# Altium PCB PPG_Proto_1.0.pcbdoc (part 1 of 2)
Units mil, origin at the board's own origin, x right, y up, seen from the top; angles counter-clockwise.
Board outline 5468.87 x 9475.06 mil, 2 copper layers (Top Layer, Bottom Layer); 64 components, 100 nets, 316 pads, 85 vias.
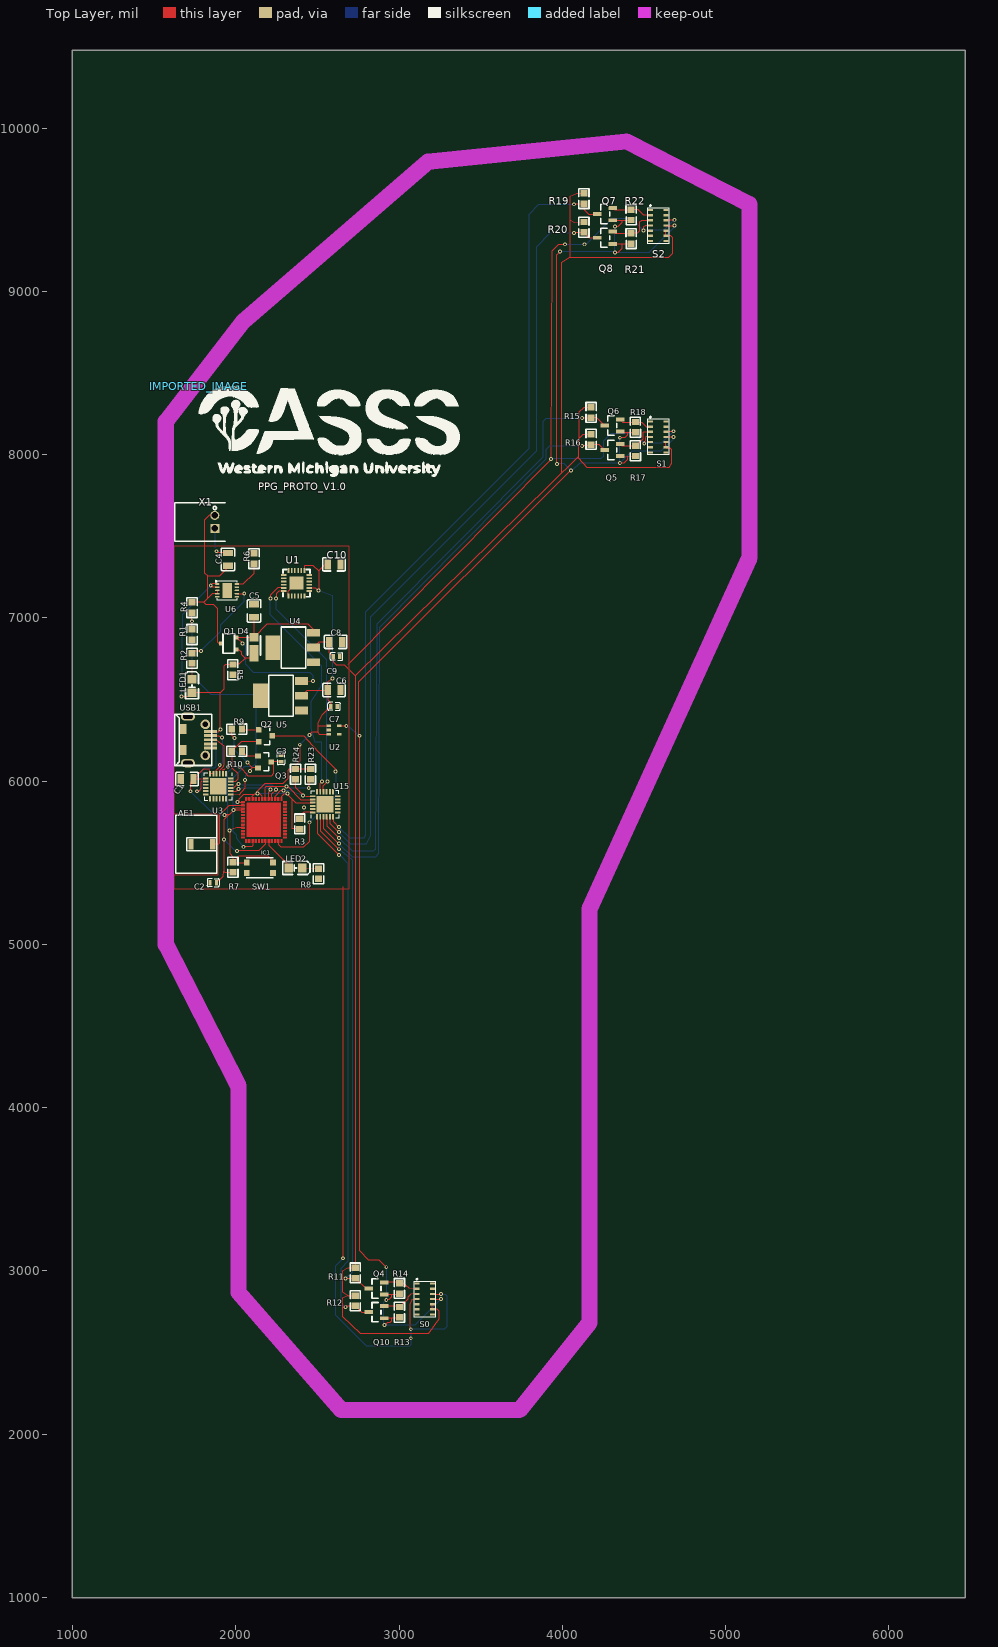
[diagram p0: Top Layer view]
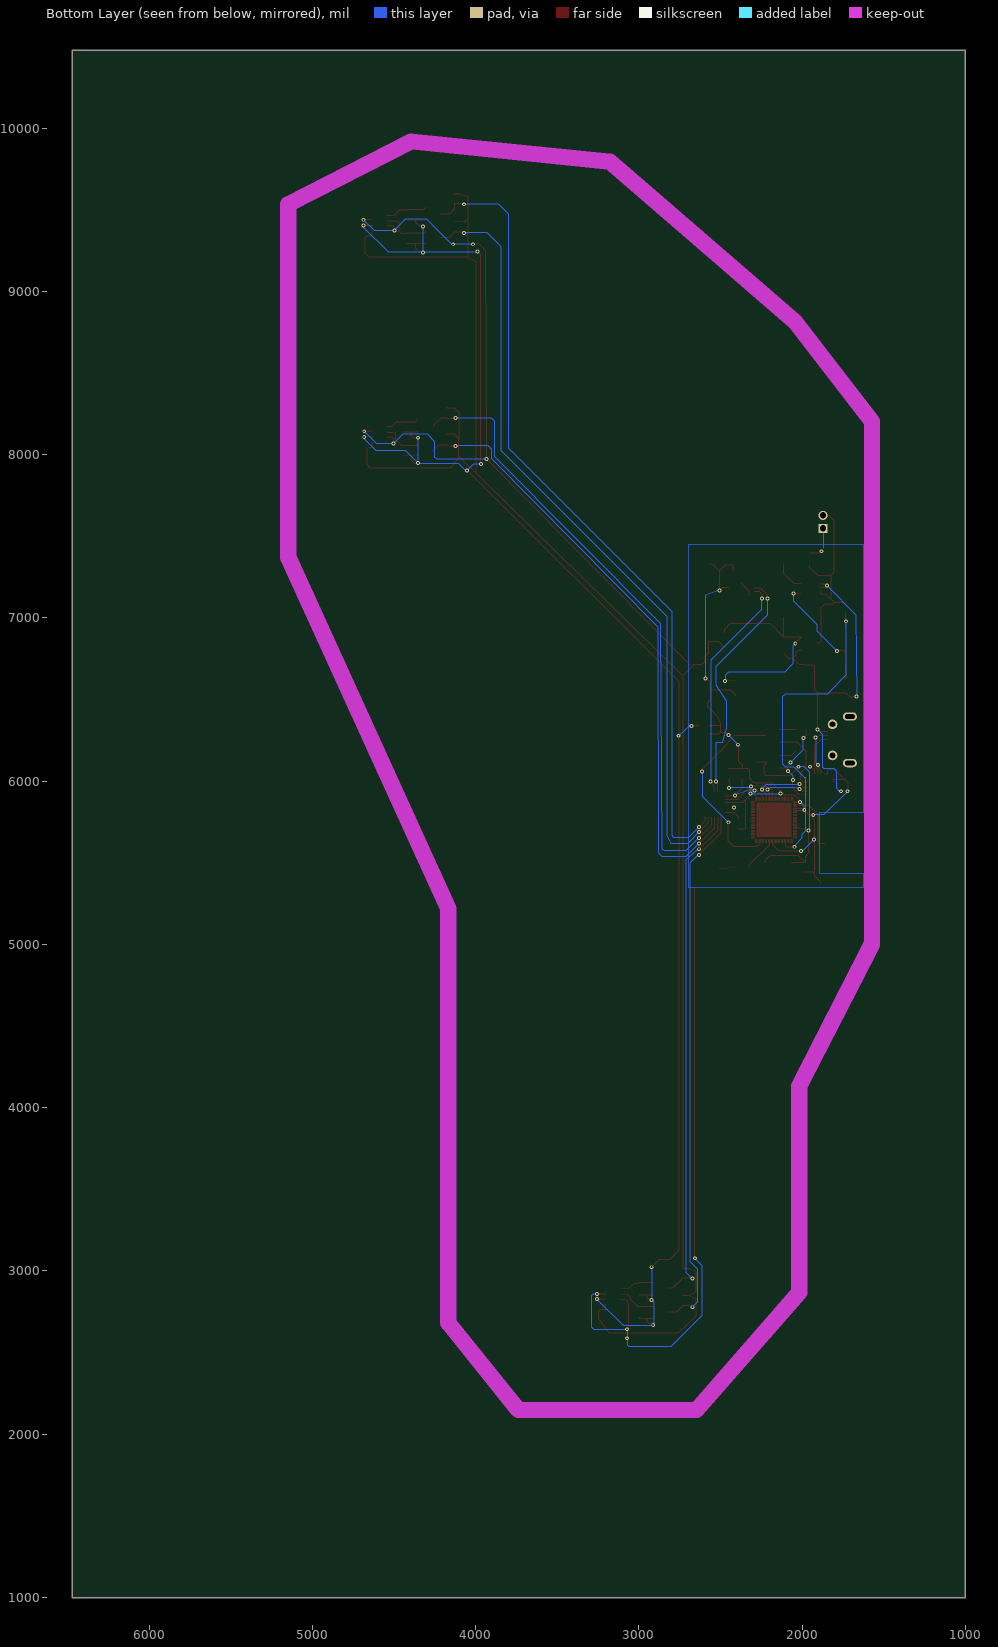
[diagram p1: Bottom Layer view, seen from below]

## Layer stack, top to bottom
Top Layer: signal copper (thickness not stored)
Dielectric: dielectric 12.6, FR-4, Dk 4.8
Bottom Layer: signal copper (thickness not stored)

## Board outline
6468.87,1000 1000,1000 1000,10475.06 6468.87,10475.06

## Components (designator, comment, footprint, x,y, rotation, side; value= is the part's Value field where it differs from the comment)
AE1 "AMCA31-2R450G-S1F-T3" AMCA31-2R450G-S1F-T3.PACK 1792,5613.06 r90 top
C1 "10uF" C0805 1702,6013.06 r180 top
C2 "1uF" C0402 1862,5378.06 r0 top
C3 "1uF" C0402 2277,6138.06 r270 top
C4 "10uF" C0805 1952,7358.06 r270 top
C5 "10uF" C0805 2112,7043.06 r270 top
C6 "10uF" C0805 2602,6558.06 r0 top
C7 "1uF" C0402 2602,6458.06 r180 top
C8 "10uF" C0805 2612,6853.06 r180 top
C9 "1uF" C0402 2617,6763.06 r180 top
C10 "10uF" C0805 2602,7328.06 r0 top
D4 "MBR120" SOD-123HE_L2.8-W1.8-LS3.7-RD 2111.95,6833.06 r90 top
IC1 "ESP32-PICO-V4" QFN48 2172,5763.06 r0 top
IMPORTED_IMAGE "IMPORTED_IMAGE" IMPORTED_IMAGE 1774.12,8419.39 r0 top
LED1 "SZYY0805YG --GREEN LED" LED0805-R-RD 1732,6583.06 r270 top
LED2 "SZYY0805YG --GREEN LED" LED0805-R-RD 2367,5468.06 r180 top
Q1 "DMP2045U-7" SOT-23F 1957,6843.06 r90 top
Q2 "MMBT2222ALT1" SOT23-3 2182,6278.06 r270 top
Q3 "MMBT2222ALT1" SOT23-3 2177,6118.06 r270 top
Q4 "2N7002LT1G" SOT-23_L2.9-W1.3-P0.95-LS2.4-BR 2862,2893.06 r0 top
Q5 "2N7002LT1G" SOT-23_L2.9-W1.3-P0.95-LS2.4-BR 4307,8028.06 r0 top
Q6 "2N7002LT1G" SOT-23_L2.9-W1.3-P0.95-LS2.4-BR 4307,8178.06 r0 top
Q7 "2N7002LT1G" SOT-23_L2.9-W1.3-P0.95-LS2.4-BR 4262,9473.06 r0 top
Q8 "2N7002LT1G" SOT-23_L2.9-W1.3-P0.95-LS2.4-BR 4262,9328.06 r0 top
Q10 "2N7002LT1G" SOT-23_L2.9-W1.3-P0.95-LS2.4-BR 2862,2748.06 r0 top
R1 "100K" R0603 1732,6898.06 r90 top
R2 "10K" R0603 1732,6753.06 r90 top
R3 "10K" R0603 2392,5738.06 r90 top
R4 "100K" R0603 1732,7063.06 r90 top
R5 "100K" R0603 1982,6683.06 r90 top
R6 "10K" R0603 2112,7363.06 r270 top
R7 "10K" R0603 1982,5473.06 r270 top
R8 "10K" R0603 2507,5433.06 r90 top
R9 "10K" R0603 2007,6318.06 r0 top
R10 "10K" R0603 2007,6183.06 r0 top
R11 "4.7K" R0603 2732,2988.06 r90 top
R12 "4.7K" R0603 2732,2818.06 r90 top
R13 "4.7K" R0603 3002,2748.06 r270 top
R14 "4.7K" R0603 3002,2893.06 r270 top
R15 "4.7K" R0603 4177,8258.06 r90 top
R16 "4.7K" R0603 4177,8093.06 r90 top
R17 "4.7K" R0603 4447,8023.06 r270 top
R18 "4.7K" R0603 4447,8168.06 r270 top
R19 "4.7K" R0603 4132,9568.06 r90 top
R20 "4.7K" R0603 4132,9393.06 r90 top
R21 "4.7K" R0603 4422,9323.06 r270 top
R22 "4.7K" R0603 4422,9468.06 r270 top
R23 "4.7K" R0603 2457,6043.06 r90 top
R24 "4.7K" R0603 2367,6043.06 r90 top
S0 "MAX30105SMD" OLGA-14 3157,2828.06 r0 top
S1 "MAX30105SMD" OLGA-14 4587,8108.06 r0 top
S2 "MAX30105SMD" OLGA-14 4587,9403.06 r0 top
SW1 "KMR2" BTN_KMR2_4.6X2.8 2067,5438.06 r180 top
U1 "MPU6050" QFN50P400X400X95-25T265X275N 2372,7213.06 r0 top
U2 "TLV70018DCKR" SC70 2602,6313.06 r270 top
U3 "CP2104" QFN-24-1EP_4X4MM_PITCH0.5MM 1892,5968.06 r270 top
U4 "ADP3338AKCZ-5-R7" SOT-223 2352,6818.06 r180 top
U5 "ADP3338AKCZ-3.3RL7" SOT-223 2277,6523.06 r180 top
U6 "MCP73223-C2SI/MF COPY" TDFN-10_L3.0-W3.0-P0.50-BL-EP 1947,7168.06 r270 top
U15 "TCA9548A_QFN" QFN-24-1EP_4X4MM_PITCH0.5MM 2547,5858.06 r90 top
USB1 "MICRO USB 5S B" MICRO-USB-1 1757,6253.06 r180 top
X1 "S2B-PH-K-S(LF)(SN)" S2B-PH-K-S(LF)(SN) 1872,7588.06 r0 top
? "" ? 5811.93,6033.06 r0 top
? "" ? 3352,1727.53 r0 top

## Footprints (in the part's own frame and the unit in brackets; to place one, negate y for a bottom-side part, rotate by r counter-clockwise, add the part's x,y. Pads: shape width x height; smd on the part's side, far side on the other; paste and mask are expansions set on the pad)
AMCA31-2R450G-S1F-T3.PACK [mil]
  rect 63x31.5 smd: G(0,66.93) S(0,-66.93)
  silkscreen extent -177,-92 177,160
BTN_KMR2_4.6X2.8 [mil]
  rect 35.43x35.43 smd: A(0,0) A'(-161.42,0) B(0,-62.99) B'(-161.42,-62.99)
  silkscreen extent -163,-92 2,29
C0402 [mm]
  rect 0.5x0.8 smd: 1(-0.5,0) 2(0.5,0)
  silkscreen extent -0.95,-0.6 0.95,0.6
C0805 [mm]
  rect 1x1.55 smd: 1(-1,0) 2(1,0)
  silkscreen extent -1.75,-1.04 1.75,1.04
IMPORTED_IMAGE [mil]
  silkscreen extent -1,-555 1598,0
LED0805-R-RD [mil]
  rect 51.2x55.1 smd: 1(41.35,0) 2(-41.35,0)
  silkscreen extent -88,-41 78,40
MICRO-USB-1 [mm]
  round 1.5 hole 0.9: 0(-1.44,2.431) 0(-1.44,-2.41)
  oval 2.199x1.3 hole 0.7 slot 1.5 at 0 deg: 0(1.26,3.619) 0(1.26,-3.619)
  rect 1.2x1.6 smd: 0(2.071,-1.683) 0(2.087,1.596)
  rect 2x0.45 smd: 1(-2.225,-1.31) 2(-2.225,-0.66) 3(-2.225,-0.01) 4(-2.225,0.64) 5(-2.225,1.29)
  silkscreen extent -2.43,-4 3.33,4
OLGA-14 [mm]
  rect 0.75x0.35 smd: 1(-1.2,2.4) 2(-1.2,1.6) 3(-1.2,0.8) 4(-1.2,0) 5(-1.2,-0.8) 6(-1.2,-1.6) 7(-1.2,-2.4) 8(1.2,-2.4) 9(1.2,-1.6) 10(1.2,-0.8) 11(1.2,0) 12(1.2,0.8) 13(1.2,1.6) 14(1.2,2.4)
  silkscreen extent -1.65,-2.8 1.65,3.2
QFN48 [mil]
  round 0 smd: 1(-128.94,108.27) 2(-128.94,88.58) 3(-128.94,68.9) 4(-128.94,49.21) 5(-128.94,29.53) 6(-128.94,9.84) 7(-128.94,-9.84) 8(-128.94,-29.53) 9(-128.94,-49.21) 10(-128.94,-68.9) 11(-128.94,-88.58) 12(-128.94,-108.27) 13(-108.27,-128.94) 14(-88.58,-128.94) 15(-68.9,-128.94) 16(-49.21,-128.94) 17(-29.53,-128.94) 18(-9.84,-128.94) 19(9.84,-128.94) 20(29.53,-128.94) 21(49.21,-128.94) 22(68.9,-128.94) 23(88.58,-128.94) 24(108.27,-128.94) 25(128.94,-108.27) 26(128.94,-88.58) 27(128.94,-68.9) 28(128.94,-49.21) 29(128.94,-29.53) 30(128.94,-9.84) 31(128.94,9.84) 32(128.94,29.53) 33(128.94,49.21) 34(128.94,68.9) 35(128.94,88.58) 36(128.94,108.27) 37(108.27,128.94) 38(88.58,128.94) 39(68.9,128.94) 40(49.21,128.94) 41(29.53,128.94) 42(9.84,128.94) 43(-9.84,128.94) 44(-29.53,128.94) 45(-49.21,128.94) 46(-68.9,128.94) 47(-88.58,128.94) 48(-108.27,128.94) EXP(0,0)
  Top Layer region: -104.5,99.27 -104.46,99.9 -104.35,100.53 -104.16,101.13 -103.9,101.7 -103.57,102.24 -103.19,102.74 -102.74,103.19 -102.24,103.57 -101.7,103.9 -101.13,104.16 -100.53,104.35 -99.9,104.46 -99.27,104.5 99.27,104.5 99.9,104.46 100.53,104.35 101.13,104.16 101.7,103.9 102.24,103.57 102.74,103.19 103.19,102.74 103.57,102.24 103.9,101.7 104.16,101.13 104.35,100.53 104.46,99.9 104.5,99.27 104.5,-99.27 104.46,-99.9 104.35,-100.53 104.16,-101.13 103.9,-101.7 103.57,-102.24 103.19,-102.74 102.74,-103.19 102.24,-103.57 101.7,-103.9 101.13,-104.16 100.53,-104.35 99.9,-104.46 99.27,-104.5 -99.27,-104.5 -99.9,-104.46 -100.53,-104.35 -101.13,-104.16 -101.7,-103.9 -102.24,-103.57 -102.74,-103.19 -103.19,-102.74 -103.57,-102.24 -103.9,-101.7 -104.16,-101.13 -104.35,-100.53 -104.46,-99.9 -104.5,-99.27
  Top Layer region: -119.88,114.17 -119.67,114.16 -119.46,114.12 -119.25,114.06 -119.06,113.97 -118.88,113.86 -118.71,113.73 -118.56,113.58 -118.42,113.41 -118.31,113.22 -118.23,113.03 -118.16,112.83 -118.12,112.61 -118.11,112.4 -118.11,104.13 -118.12,103.92 -118.16,103.71 -118.23,103.51 -118.31,103.31 -118.42,103.13 -118.56,102.96 -118.71,102.81 -118.88,102.68 -119.06,102.56 -119.25,102.48 -119.46,102.41 -119.67,102.37 -119.88,102.36 -137.99,102.36 -138.21,102.37 -138.42,102.41 -138.62,102.48 -138.82,102.56 -139,102.68 -139.17,102.81 -139.32,102.96 -139.45,103.13 -139.56,103.31 -139.65,103.51 -139.71,103.71 -139.75,103.92 -139.76,104.13 -139.76,112.4 -139.75,112.61 -139.71,112.83 -139.65,113.03 -139.56,113.22 -139.45,113.41 -139.32,113.58 -139.17,113.73 -139,113.86 -138.82,113.97 -138.62,114.06 -138.42,114.12 -138.21,114.16 -137.99,114.17
  Top Layer region: -119.88,94.49 -119.67,94.48 -119.46,94.44 -119.25,94.37 -119.06,94.29 -118.88,94.17 -118.71,94.04 -118.56,93.89 -118.42,93.72 -118.31,93.54 -118.23,93.34 -118.16,93.14 -118.12,92.93 -118.11,92.72 -118.11,84.45 -118.12,84.24 -118.16,84.02 -118.23,83.82 -118.31,83.63 -118.42,83.44 -118.56,83.27 -118.71,83.12 -118.88,82.99 -119.06,82.88 -119.25,82.79 -119.46,82.73 -119.67,82.69 -119.88,82.68 -137.99,82.68 -138.21,82.69 -138.42,82.73 -138.62,82.79 -138.82,82.88 -139,82.99 -139.17,83.12 -139.32,83.27 -139.45,83.44 -139.56,83.63 -139.65,83.82 -139.71,84.02 -139.75,84.24 -139.76,84.45 -139.76,92.72 -139.75,92.93 -139.71,93.14 -139.65,93.34 -139.56,93.54 -139.45,93.72 -139.32,93.89 -139.17,94.04 -139,94.17 -138.82,94.29 -138.62,94.37 -138.42,94.44 -138.21,94.48 -137.99,94.49
  Top Layer region: -119.88,74.8 -119.67,74.79 -119.46,74.75 -119.25,74.69 -119.06,74.6 -118.88,74.49 -118.71,74.36 -118.56,74.21 -118.42,74.04 -118.31,73.85 -118.23,73.66 -118.16,73.46 -118.12,73.24 -118.11,73.03 -118.11,64.76 -118.12,64.55 -118.16,64.34 -118.23,64.14 -118.31,63.94 -118.42,63.76 -118.56,63.59 -118.71,63.44 -118.88,63.31 -119.06,63.19 -119.25,63.11 -119.46,63.04 -119.67,63 -119.88,62.99 -137.99,62.99 -138.21,63 -138.42,63.04 -138.62,63.11 -138.82,63.19 -139,63.31 -139.17,63.44 -139.32,63.59 -139.45,63.76 -139.56,63.94 -139.65,64.14 -139.71,64.34 -139.75,64.55 -139.76,64.76 -139.76,73.03 -139.75,73.24 -139.71,73.46 -139.65,73.66 -139.56,73.85 -139.45,74.04 -139.32,74.21 -139.17,74.36 -139,74.49 -138.82,74.6 -138.62,74.69 -138.42,74.75 -138.21,74.79 -137.99,74.8
  Top Layer region: -119.88,55.12 -119.67,55.11 -119.46,55.07 -119.25,55 -119.06,54.92 -118.88,54.8 -118.71,54.67 -118.56,54.52 -118.42,54.35 -118.31,54.17 -118.23,53.97 -118.16,53.77 -118.12,53.56 -118.11,53.35 -118.11,45.08 -118.12,44.87 -118.16,44.65 -118.23,44.45 -118.31,44.26 -118.42,44.07 -118.56,43.9 -118.71,43.75 -118.88,43.62 -119.06,43.51 -119.25,43.42 -119.46,43.36 -119.67,43.32 -119.88,43.31 -137.99,43.31 -138.21,43.32 -138.42,43.36 -138.62,43.42 -138.82,43.51 -139,43.62 -139.17,43.75 -139.32,43.9 -139.45,44.07 -139.56,44.26 -139.65,44.45 -139.71,44.65 -139.75,44.87 -139.76,45.08 -139.76,53.35 -139.75,53.56 -139.71,53.77 -139.65,53.97 -139.56,54.17 -139.45,54.35 -139.32,54.52 -139.17,54.67 -139,54.8 -138.82,54.92 -138.62,55 -138.42,55.07 -138.21,55.11 -137.99,55.12
  Top Layer region: -119.88,35.43 -119.67,35.42 -119.46,35.38 -119.25,35.32 -119.06,35.23 -118.88,35.12 -118.71,34.99 -118.56,34.84 -118.42,34.67 -118.31,34.48 -118.23,34.29 -118.16,34.09 -118.12,33.87 -118.11,33.66 -118.11,25.39 -118.12,25.18 -118.16,24.97 -118.23,24.77 -118.31,24.57 -118.42,24.39 -118.56,24.22 -118.71,24.07 -118.88,23.94 -119.06,23.82 -119.25,23.74 -119.46,23.67 -119.67,23.63 -119.88,23.62 -137.99,23.62 -138.21,23.63 -138.42,23.67 -138.62,23.74 -138.82,23.82 -139,23.94 -139.17,24.07 -139.32,24.22 -139.45,24.39 -139.56,24.57 -139.65,24.77 -139.71,24.97 -139.75,25.18 -139.76,25.39 -139.76,33.66 -139.75,33.87 -139.71,34.09 -139.65,34.29 -139.56,34.48 -139.45,34.67 -139.32,34.84 -139.17,34.99 -139,35.12 -138.82,35.23 -138.62,35.32 -138.42,35.38 -138.21,35.42 -137.99,35.43
  Top Layer region: -119.88,15.75 -119.67,15.74 -119.46,15.7 -119.25,15.63 -119.06,15.55 -118.88,15.43 -118.71,15.3 -118.56,15.15 -118.42,14.98 -118.31,14.8 -118.23,14.6 -118.16,14.4 -118.12,14.19 -118.11,13.98 -118.11,5.71 -118.12,5.5 -118.16,5.28 -118.23,5.08 -118.31,4.89 -118.42,4.7 -118.56,4.53 -118.71,4.38 -118.88,4.25 -119.06,4.14 -119.25,4.05 -119.46,3.99 -119.67,3.95 -119.88,3.94 -137.99,3.94 -138.21,3.95 -138.42,3.99 -138.62,4.05 -138.82,4.14 -139,4.25 -139.17,4.38 -139.32,4.53 -139.45,4.7 -139.56,4.89 -139.65,5.08 -139.71,5.28 -139.75,5.5 -139.76,5.71 -139.76,13.98 -139.75,14.19 -139.71,14.4 -139.65,14.6 -139.56,14.8 -139.45,14.98 -139.32,15.15 -139.17,15.3 -139,15.43 -138.82,15.55 -138.62,15.63 -138.42,15.7 -138.21,15.74 -137.99,15.75
  Top Layer region: -119.88,-3.94 -119.67,-3.95 -119.46,-3.99 -119.25,-4.05 -119.06,-4.14 -118.88,-4.25 -118.71,-4.38 -118.56,-4.53 -118.42,-4.7 -118.31,-4.89 -118.23,-5.08 -118.16,-5.28 -118.12,-5.5 -118.11,-5.71 -118.11,-13.98 -118.12,-14.19 -118.16,-14.4 -118.23,-14.6 -118.31,-14.8 -118.42,-14.98 -118.56,-15.15 -118.71,-15.3 -118.88,-15.43 -119.06,-15.55 -119.25,-15.63 -119.46,-15.7 -119.67,-15.74 -119.88,-15.75 -137.99,-15.75 -138.21,-15.74 -138.42,-15.7 -138.62,-15.63 -138.82,-15.55 -139,-15.43 -139.17,-15.3 -139.32,-15.15 -139.45,-14.98 -139.56,-14.8 -139.65,-14.6 -139.71,-14.4 -139.75,-14.19 -139.76,-13.98 -139.76,-5.71 -139.75,-5.5 -139.71,-5.28 -139.65,-5.08 -139.56,-4.89 -139.45,-4.7 -139.32,-4.53 -139.17,-4.38 -139,-4.25 -138.82,-4.14 -138.62,-4.05 -138.42,-3.99 -138.21,-3.95 -137.99,-3.94
  Top Layer region: -119.88,-23.62 -119.67,-23.63 -119.46,-23.67 -119.25,-23.74 -119.06,-23.82 -118.88,-23.94 -118.71,-24.07 -118.56,-24.22 -118.42,-24.39 -118.31,-24.57 -118.23,-24.77 -118.16,-24.97 -118.12,-25.18 -118.11,-25.39 -118.11,-33.66 -118.12,-33.87 -118.16,-34.09 -118.23,-34.29 -118.31,-34.48 -118.42,-34.67 -118.56,-34.84 -118.71,-34.99 -118.88,-35.12 -119.06,-35.23 -119.25,-35.32 -119.46,-35.38 -119.67,-35.42 -119.88,-35.43 -137.99,-35.43 -138.21,-35.42 -138.42,-35.38 -138.62,-35.32 -138.82,-35.23 -139,-35.12 -139.17,-34.99 -139.32,-34.84 -139.45,-34.67 -139.56,-34.48 -139.65,-34.29 -139.71,-34.09 -139.75,-33.87 -139.76,-33.66 -139.76,-25.39 -139.75,-25.18 -139.71,-24.97 -139.65,-24.77 -139.56,-24.57 -139.45,-24.39 -139.32,-24.22 -139.17,-24.07 -139,-23.94 -138.82,-23.82 -138.62,-23.74 -138.42,-23.67 -138.21,-23.63 -137.99,-23.62
  Top Layer region: -119.88,-43.31 -119.67,-43.32 -119.46,-43.36 -119.25,-43.42 -119.06,-43.51 -118.88,-43.62 -118.71,-43.75 -118.56,-43.9 -118.42,-44.07 -118.31,-44.26 -118.23,-44.45 -118.16,-44.65 -118.12,-44.87 -118.11,-45.08 -118.11,-53.35 -118.12,-53.56 -118.16,-53.77 -118.23,-53.97 -118.31,-54.17 -118.42,-54.35 -118.56,-54.52 -118.71,-54.67 -118.88,-54.8 -119.06,-54.92 -119.25,-55 -119.46,-55.07 -119.67,-55.11 -119.88,-55.12 -137.99,-55.12 -138.21,-55.11 -138.42,-55.07 -138.62,-55 -138.82,-54.92 -139,-54.8 -139.17,-54.67 -139.32,-54.52 -139.45,-54.35 -139.56,-54.17 -139.65,-53.97 -139.71,-53.77 -139.75,-53.56 -139.76,-53.35 -139.76,-45.08 -139.75,-44.87 -139.71,-44.65 -139.65,-44.45 -139.56,-44.26 -139.45,-44.07 -139.32,-43.9 -139.17,-43.75 -139,-43.62 -138.82,-43.51 -138.62,-43.42 -138.42,-43.36 -138.21,-43.32 -137.99,-43.31
  Top Layer region: -119.88,-62.99 -119.67,-63 -119.46,-63.04 -119.25,-63.11 -119.06,-63.19 -118.88,-63.31 -118.71,-63.44 -118.56,-63.59 -118.42,-63.76 -118.31,-63.94 -118.23,-64.14 -118.16,-64.34 -118.12,-64.55 -118.11,-64.76 -118.11,-73.03 -118.12,-73.24 -118.16,-73.46 -118.23,-73.66 -118.31,-73.85 -118.42,-74.04 -118.56,-74.21 -118.71,-74.36 -118.88,-74.49 -119.06,-74.6 -119.25,-74.69 -119.46,-74.75 -119.67,-74.79 -119.88,-74.8 -137.99,-74.8 -138.21,-74.79 -138.42,-74.75 -138.62,-74.69 -138.82,-74.6 -139,-74.49 -139.17,-74.36 -139.32,-74.21 -139.45,-74.04 -139.56,-73.85 -139.65,-73.66 -139.71,-73.46 -139.75,-73.24 -139.76,-73.03 -139.76,-64.76 -139.75,-64.55 -139.71,-64.34 -139.65,-64.14 -139.56,-63.94 -139.45,-63.76 -139.32,-63.59 -139.17,-63.44 -139,-63.31 -138.82,-63.19 -138.62,-63.11 -138.42,-63.04 -138.21,-63 -137.99,-62.99
  Top Layer region: -119.88,-82.68 -119.67,-82.69 -119.46,-82.73 -119.25,-82.79 -119.06,-82.88 -118.88,-82.99 -118.71,-83.12 -118.56,-83.27 -118.42,-83.44 -118.31,-83.63 -118.23,-83.82 -118.16,-84.02 -118.12,-84.24 -118.11,-84.45 -118.11,-92.72 -118.12,-92.93 -118.16,-93.14 -118.23,-93.34 -118.31,-93.54 -118.42,-93.72 -118.56,-93.89 -118.71,-94.04 -118.88,-94.17 -119.06,-94.29 -119.25,-94.37 -119.46,-94.44 -119.67,-94.48 -119.88,-94.49 -137.99,-94.49 -138.21,-94.48 -138.42,-94.44 -138.62,-94.37 -138.82,-94.29 -139,-94.17 -139.17,-94.04 -139.32,-93.89 -139.45,-93.72 -139.56,-93.54 -139.65,-93.34 -139.71,-93.14 -139.75,-92.93 -139.76,-92.72 -139.76,-84.45 -139.75,-84.24 -139.71,-84.02 -139.65,-83.82 -139.56,-83.63 -139.45,-83.44 -139.32,-83.27 -139.17,-83.12 -139,-82.99 -138.82,-82.88 -138.62,-82.79 -138.42,-82.73 -138.21,-82.69 -137.99,-82.68
  Top Layer region: -119.88,-102.36 -119.67,-102.37 -119.46,-102.41 -119.25,-102.48 -119.06,-102.56 -118.88,-102.68 -118.71,-102.81 -118.56,-102.96 -118.42,-103.13 -118.31,-103.31 -118.23,-103.51 -118.16,-103.71 -118.12,-103.92 -118.11,-104.13 -118.11,-112.4 -118.12,-112.61 -118.16,-112.83 -118.23,-113.03 -118.31,-113.22 -118.42,-113.41 -118.56,-113.58 -118.71,-113.73 -118.88,-113.86 -119.06,-113.97 -119.25,-114.06 -119.46,-114.12 -119.67,-114.16 -119.88,-114.17 -137.99,-114.17 -138.21,-114.16 -138.42,-114.12 -138.62,-114.06 -138.82,-113.97 -139,-113.86 -139.17,-113.73 -139.32,-113.58 -139.45,-113.41 -139.56,-113.22 -139.65,-113.03 -139.71,-112.83 -139.75,-112.61 -139.76,-112.4 -139.76,-104.13 -139.75,-103.92 -139.71,-103.71 -139.65,-103.51 -139.56,-103.31 -139.45,-103.13 -139.32,-102.96 -139.17,-102.81 -139,-102.68 -138.82,-102.56 -138.62,-102.48 -138.42,-102.41 -138.21,-102.37 -137.99,-102.36
  Top Layer region: -114.17,-119.88 -114.16,-119.67 -114.12,-119.46 -114.06,-119.25 -113.97,-119.06 -113.86,-118.88 -113.73,-118.71 -113.58,-118.56 -113.41,-118.42 -113.22,-118.31 -113.03,-118.23 -112.83,-118.16 -112.61,-118.12 -112.4,-118.11 -104.13,-118.11 -103.92,-118.12 -103.71,-118.16 -103.51,-118.23 -103.31,-118.31 -103.13,-118.42 -102.96,-118.56 -102.81,-118.71 -102.68,-118.88 -102.56,-119.06 -102.48,-119.25 -102.41,-119.46 -102.37,-119.67 -102.36,-119.88 -102.36,-137.99 -102.37,-138.21 -102.41,-138.42 -102.48,-138.62 -102.56,-138.82 -102.68,-139 -102.81,-139.17 -102.96,-139.32 -103.13,-139.45 -103.31,-139.56 -103.51,-139.65 -103.71,-139.71 -103.92,-139.75 -104.13,-139.76 -112.4,-139.76 -112.61,-139.75 -112.83,-139.71 -113.03,-139.65 -113.22,-139.56 -113.41,-139.45 -113.58,-139.32 -113.73,-139.17 -113.86,-139 -113.97,-138.82 -114.06,-138.62 -114.12,-138.42 -114.16,-138.21 -114.17,-137.99
  Top Layer region: -94.49,-119.88 -94.48,-119.67 -94.44,-119.46 -94.37,-119.25 -94.29,-119.06 -94.17,-118.88 -94.04,-118.71 -93.89,-118.56 -93.72,-118.42 -93.54,-118.31 -93.34,-118.23 -93.14,-118.16 -92.93,-118.12 -92.72,-118.11 -84.45,-118.11 -84.24,-118.12 -84.02,-118.16 -83.82,-118.23 -83.63,-118.31 -83.44,-118.42 -83.27,-118.56 -83.12,-118.71 -82.99,-118.88 -82.88,-119.06 -82.79,-119.25 -82.73,-119.46 -82.69,-119.67 -82.68,-119.88 -82.68,-137.99 -82.69,-138.21 -82.73,-138.42 -82.79,-138.62 -82.88,-138.82 -82.99,-139 -83.12,-139.17 -83.27,-139.32 -83.44,-139.45 -83.63,-139.56 -83.82,-139.65 -84.02,-139.71 -84.24,-139.75 -84.45,-139.76 -92.72,-139.76 -92.93,-139.75 -93.14,-139.71 -93.34,-139.65 -93.54,-139.56 -93.72,-139.45 -93.89,-139.32 -94.04,-139.17 -94.17,-139 -94.29,-138.82 -94.37,-138.62 -94.44,-138.42 -94.48,-138.21 -94.49,-137.99
  Top Layer region: -74.8,-119.88 -74.79,-119.67 -74.75,-119.46 -74.69,-119.25 -74.6,-119.06 -74.49,-118.88 -74.36,-118.71 -74.21,-118.56 -74.04,-118.42 -73.85,-118.31 -73.66,-118.23 -73.46,-118.16 -73.24,-118.12 -73.03,-118.11 -64.76,-118.11 -64.55,-118.12 -64.34,-118.16 -64.14,-118.23 -63.94,-118.31 -63.76,-118.42 -63.59,-118.56 -63.44,-118.71 -63.31,-118.88 -63.19,-119.06 -63.11,-119.25 -63.04,-119.46 -63,-119.67 -62.99,-119.88 -62.99,-137.99 -63,-138.21 -63.04,-138.42 -63.11,-138.62 -63.19,-138.82 -63.31,-139 -63.44,-139.17 -63.59,-139.32 -63.76,-139.45 -63.94,-139.56 -64.14,-139.65 -64.34,-139.71 -64.55,-139.75 -64.76,-139.76 -73.03,-139.76 -73.24,-139.75 -73.46,-139.71 -73.66,-139.65 -73.85,-139.56 -74.04,-139.45 -74.21,-139.32 -74.36,-139.17 -74.49,-139 -74.6,-138.82 -74.69,-138.62 -74.75,-138.42 -74.79,-138.21 -74.8,-137.99
  Top Layer region: -55.12,-119.88 -55.11,-119.67 -55.07,-119.46 -55,-119.25 -54.92,-119.06 -54.8,-118.88 -54.67,-118.71 -54.52,-118.56 -54.35,-118.42 -54.17,-118.31 -53.97,-118.23 -53.77,-118.16 -53.56,-118.12 -53.35,-118.11 -45.08,-118.11 -44.87,-118.12 -44.65,-118.16 -44.45,-118.23 -44.26,-118.31 -44.07,-118.42 -43.9,-118.56 -43.75,-118.71 -43.62,-118.88 -43.51,-119.06 -43.42,-119.25 -43.36,-119.46 -43.32,-119.67 -43.31,-119.88 -43.31,-137.99 -43.32,-138.21 -43.36,-138.42 -43.42,-138.62 -43.51,-138.82 -43.62,-139 -43.75,-139.17 -43.9,-139.32 -44.07,-139.45 -44.26,-139.56 -44.45,-139.65 -44.65,-139.71 -44.87,-139.75 -45.08,-139.76 -53.35,-139.76 -53.56,-139.75 -53.77,-139.71 -53.97,-139.65 -54.17,-139.56 -54.35,-139.45 -54.52,-139.32 -54.67,-139.17 -54.8,-139 -54.92,-138.82 -55,-138.62 -55.07,-138.42 -55.11,-138.21 -55.12,-137.99
  Top Layer region: -35.43,-119.88 -35.42,-119.67 -35.38,-119.46 -35.32,-119.25 -35.23,-119.06 -35.12,-118.88 -34.99,-118.71 -34.84,-118.56 -34.67,-118.42 -34.48,-118.31 -34.29,-118.23 -34.09,-118.16 -33.87,-118.12 -33.66,-118.11 -25.39,-118.11 -25.18,-118.12 -24.97,-118.16 -24.77,-118.23 -24.57,-118.31 -24.39,-118.42 -24.22,-118.56 -24.07,-118.71 -23.94,-118.88 -23.82,-119.06 -23.74,-119.25 -23.67,-119.46 -23.63,-119.67 -23.62,-119.88 -23.62,-137.99 -23.63,-138.21 -23.67,-138.42 -23.74,-138.62 -23.82,-138.82 -23.94,-139 -24.07,-139.17 -24.22,-139.32 -24.39,-139.45 -24.57,-139.56 -24.77,-139.65 -24.97,-139.71 -25.18,-139.75 -25.39,-139.76 -33.66,-139.76 -33.87,-139.75 -34.09,-139.71 -34.29,-139.65 -34.48,-139.56 -34.67,-139.45 -34.84,-139.32 -34.99,-139.17 -35.12,-139 -35.23,-138.82 -35.32,-138.62 -35.38,-138.42 -35.42,-138.21 -35.43,-137.99
  Top Layer region: -15.75,-119.88 -15.74,-119.67 -15.7,-119.46 -15.63,-119.25 -15.55,-119.06 -15.43,-118.88 -15.3,-118.71 -15.15,-118.56 -14.98,-118.42 -14.8,-118.31 -14.6,-118.23 -14.4,-118.16 -14.19,-118.12 -13.98,-118.11 -5.71,-118.11 -5.5,-118.12 -5.28,-118.16 -5.08,-118.23 -4.89,-118.31 -4.7,-118.42 -4.53,-118.56 -4.38,-118.71 -4.25,-118.88 -4.14,-119.06 -4.05,-119.25 -3.99,-119.46 -3.95,-119.67 -3.94,-119.88 -3.94,-137.99 -3.95,-138.21 -3.99,-138.42 -4.05,-138.62 -4.14,-138.82 -4.25,-139 -4.38,-139.17 -4.53,-139.32 -4.7,-139.45 -4.89,-139.56 -5.08,-139.65 -5.28,-139.71 -5.5,-139.75 -5.71,-139.76 -13.98,-139.76 -14.19,-139.75 -14.4,-139.71 -14.6,-139.65 -14.8,-139.56 -14.98,-139.45 -15.15,-139.32 -15.3,-139.17 -15.43,-139 -15.55,-138.82 -15.63,-138.62 -15.7,-138.42 -15.74,-138.21 -15.75,-137.99
  Top Layer region: 3.94,-119.88 3.95,-119.67 3.99,-119.46 4.05,-119.25 4.14,-119.06 4.25,-118.88 4.38,-118.71 4.53,-118.56 4.7,-118.42 4.89,-118.31 5.08,-118.23 5.28,-118.16 5.5,-118.12 5.71,-118.11 13.98,-118.11 14.19,-118.12 14.4,-118.16 14.6,-118.23 14.8,-118.31 14.98,-118.42 15.15,-118.56 15.3,-118.71 15.43,-118.88 15.55,-119.06 15.63,-119.25 15.7,-119.46 15.74,-119.67 15.75,-119.88 15.75,-137.99 15.74,-138.21 15.7,-138.42 15.63,-138.62 15.55,-138.82 15.43,-139 15.3,-139.17 15.15,-139.32 14.98,-139.45 14.8,-139.56 14.6,-139.65 14.4,-139.71 14.19,-139.75 13.98,-139.76 5.71,-139.76 5.5,-139.75 5.28,-139.71 5.08,-139.65 4.89,-139.56 4.7,-139.45 4.53,-139.32 4.38,-139.17 4.25,-139 4.14,-138.82 4.05,-138.62 3.99,-138.42 3.95,-138.21 3.94,-137.99
  Top Layer region: 23.62,-119.88 23.63,-119.67 23.67,-119.46 23.74,-119.25 23.82,-119.06 23.94,-118.88 24.07,-118.71 24.22,-118.56 24.39,-118.42 24.57,-118.31 24.77,-118.23 24.97,-118.16 25.18,-118.12 25.39,-118.11 33.66,-118.11 33.87,-118.12 34.09,-118.16 34.29,-118.23 34.48,-118.31 34.67,-118.42 34.84,-118.56 34.99,-118.71 35.12,-118.88 35.23,-119.06 35.32,-119.25 35.38,-119.46 35.42,-119.67 35.43,-119.88 35.43,-137.99 35.42,-138.21 35.38,-138.42 35.32,-138.62 35.23,-138.82 35.12,-139 34.99,-139.17 34.84,-139.32 34.67,-139.45 34.48,-139.56 34.29,-139.65 34.09,-139.71 33.87,-139.75 33.66,-139.76 25.39,-139.76 25.18,-139.75 24.97,-139.71 24.77,-139.65 24.57,-139.56 24.39,-139.45 24.22,-139.32 24.07,-139.17 23.94,-139 23.82,-138.82 23.74,-138.62 23.67,-138.42 23.63,-138.21 23.62,-137.99
  Top Layer region: 43.31,-119.88 43.32,-119.67 43.36,-119.46 43.42,-119.25 43.51,-119.06 43.62,-118.88 43.75,-118.71 43.9,-118.56 44.07,-118.42 44.26,-118.31 44.45,-118.23 44.65,-118.16 44.87,-118.12 45.08,-118.11 53.35,-118.11 53.56,-118.12 53.77,-118.16 53.97,-118.23 54.17,-118.31 54.35,-118.42 54.52,-118.56 54.67,-118.71 54.8,-118.88 54.92,-119.06 55,-119.25 55.07,-119.46 55.11,-119.67 55.12,-119.88 55.12,-137.99 55.11,-138.21 55.07,-138.42 55,-138.62 54.92,-138.82 54.8,-139 54.67,-139.17 54.52,-139.32 54.35,-139.45 54.17,-139.56 53.97,-139.65 53.77,-139.71 53.56,-139.75 53.35,-139.76 45.08,-139.76 44.87,-139.75 44.65,-139.71 44.45,-139.65 44.26,-139.56 44.07,-139.45 43.9,-139.32 43.75,-139.17 43.62,-139 43.51,-138.82 43.42,-138.62 43.36,-138.42 43.32,-138.21 43.31,-137.99
  Top Layer region: 62.99,-119.88 63,-119.67 63.04,-119.46 63.11,-119.25 63.19,-119.06 63.31,-118.88 63.44,-118.71 63.59,-118.56 63.76,-118.42 63.94,-118.31 64.14,-118.23 64.34,-118.16 64.55,-118.12 64.76,-118.11 73.03,-118.11 73.24,-118.12 73.46,-118.16 73.66,-118.23 73.85,-118.31 74.04,-118.42 74.21,-118.56 74.36,-118.71 74.49,-118.88 74.6,-119.06 74.69,-119.25 74.75,-119.46 74.79,-119.67 74.8,-119.88 74.8,-137.99 74.79,-138.21 74.75,-138.42 74.69,-138.62 74.6,-138.82 74.49,-139 74.36,-139.17 74.21,-139.32 74.04,-139.45 73.85,-139.56 73.66,-139.65 73.46,-139.71 73.24,-139.75 73.03,-139.76 64.76,-139.76 64.55,-139.75 64.34,-139.71 64.14,-139.65 63.94,-139.56 63.76,-139.45 63.59,-139.32 63.44,-139.17 63.31,-139 63.19,-138.82 63.11,-138.62 63.04,-138.42 63,-138.21 62.99,-137.99
  Top Layer region: 82.68,-119.88 82.69,-119.67 82.73,-119.46 82.79,-119.25 82.88,-119.06 82.99,-118.88 83.12,-118.71 83.27,-118.56 83.44,-118.42 83.63,-118.31 83.82,-118.23 84.02,-118.16 84.24,-118.12 84.45,-118.11 92.72,-118.11 92.93,-118.12 93.14,-118.16 93.34,-118.23 93.54,-118.31 93.72,-118.42 93.89,-118.56 94.04,-118.71 94.17,-118.88 94.29,-119.06 94.37,-119.25 94.44,-119.46 94.48,-119.67 94.49,-119.88 94.49,-137.99 94.48,-138.21 94.44,-138.42 94.37,-138.62 94.29,-138.82 94.17,-139 94.04,-139.17 93.89,-139.32 93.72,-139.45 93.54,-139.56 93.34,-139.65 93.14,-139.71 92.93,-139.75 92.72,-139.76 84.45,-139.76 84.24,-139.75 84.02,-139.71 83.82,-139.65 83.63,-139.56 83.44,-139.45 83.27,-139.32 83.12,-139.17 82.99,-139 82.88,-138.82 82.79,-138.62 82.73,-138.42 82.69,-138.21 82.68,-137.99
  Top Layer region: 102.36,-119.88 102.37,-119.67 102.41,-119.46 102.48,-119.25 102.56,-119.06 102.68,-118.88 102.81,-118.71 102.96,-118.56 103.13,-118.42 103.31,-118.31 103.51,-118.23 103.71,-118.16 103.92,-118.12 104.13,-118.11 112.4,-118.11 112.61,-118.12 112.83,-118.16 113.03,-118.23 113.22,-118.31 113.41,-118.42 113.58,-118.56 113.73,-118.71 113.86,-118.88 113.97,-119.06 114.06,-119.25 114.12,-119.46 114.16,-119.67 114.17,-119.88 114.17,-137.99 114.16,-138.21 114.12,-138.42 114.06,-138.62 113.97,-138.82 113.86,-139 113.73,-139.17 113.58,-139.32 113.41,-139.45 113.22,-139.56 113.03,-139.65 112.83,-139.71 112.61,-139.75 112.4,-139.76 104.13,-139.76 103.92,-139.75 103.71,-139.71 103.51,-139.65 103.31,-139.56 103.13,-139.45 102.96,-139.32 102.81,-139.17 102.68,-139 102.56,-138.82 102.48,-138.62 102.41,-138.42 102.37,-138.21 102.36,-137.99
  Top Layer region: 119.88,-114.17 119.67,-114.16 119.46,-114.12 119.25,-114.06 119.06,-113.97 118.88,-113.86 118.71,-113.73 118.56,-113.58 118.42,-113.41 118.31,-113.22 118.23,-113.03 118.16,-112.83 118.12,-112.61 118.11,-112.4 118.11,-104.13 118.12,-103.92 118.16,-103.71 118.23,-103.51 118.31,-103.31 118.42,-103.13 118.56,-102.96 118.71,-102.81 118.88,-102.68 119.06,-102.56 119.25,-102.48 119.46,-102.41 119.67,-102.37 119.88,-102.36 137.99,-102.36 138.21,-102.37 138.42,-102.41 138.62,-102.48 138.82,-102.56 139,-102.68 139.17,-102.81 139.32,-102.96 139.45,-103.13 139.56,-103.31 139.65,-103.51 139.71,-103.71 139.75,-103.92 139.76,-104.13 139.76,-112.4 139.75,-112.61 139.71,-112.83 139.65,-113.03 139.56,-113.22 139.45,-113.41 139.32,-113.58 139.17,-113.73 139,-113.86 138.82,-113.97 138.62,-114.06 138.42,-114.12 138.21,-114.16 137.99,-114.17
  Top Layer region: 119.88,-94.49 119.67,-94.48 119.46,-94.44 119.25,-94.37 119.06,-94.29 118.88,-94.17 118.71,-94.04 118.56,-93.89 118.42,-93.72 118.31,-93.54 118.23,-93.34 118.16,-93.14 118.12,-92.93 118.11,-92.72 118.11,-84.45 118.12,-84.24 118.16,-84.02 118.23,-83.82 118.31,-83.63 118.42,-83.44 118.56,-83.27 118.71,-83.12 118.88,-82.99 119.06,-82.88 119.25,-82.79 119.46,-82.73 119.67,-82.69 119.88,-82.68 137.99,-82.68 138.21,-82.69 138.42,-82.73 138.62,-82.79 138.82,-82.88 139,-82.99 139.17,-83.12 139.32,-83.27 139.45,-83.44 139.56,-83.63 139.65,-83.82 139.71,-84.02 139.75,-84.24 139.76,-84.45 139.76,-92.72 139.75,-92.93 139.71,-93.14 139.65,-93.34 139.56,-93.54 139.45,-93.72 139.32,-93.89 139.17,-94.04 139,-94.17 138.82,-94.29 138.62,-94.37 138.42,-94.44 138.21,-94.48 137.99,-94.49
  Top Layer region: 119.88,-74.8 119.67,-74.79 119.46,-74.75 119.25,-74.69 119.06,-74.6 118.88,-74.49 118.71,-74.36 118.56,-74.21 118.42,-74.04 118.31,-73.85 118.23,-73.66 118.16,-73.46 118.12,-73.24 118.11,-73.03 118.11,-64.76 118.12,-64.55 118.16,-64.34 118.23,-64.14 118.31,-63.94 118.42,-63.76 118.56,-63.59 118.71,-63.44 118.88,-63.31 119.06,-63.19 119.25,-63.11 119.46,-63.04 119.67,-63 119.88,-62.99 137.99,-62.99 138.21,-63 138.42,-63.04 138.62,-63.11 138.82,-63.19 139,-63.31 139.17,-63.44 139.32,-63.59 139.45,-63.76 139.56,-63.94 139.65,-64.14 139.71,-64.34 139.75,-64.55 139.76,-64.76 139.76,-73.03 139.75,-73.24 139.71,-73.46 139.65,-73.66 139.56,-73.85 139.45,-74.04 139.32,-74.21 139.17,-74.36 139,-74.49 138.82,-74.6 138.62,-74.69 138.42,-74.75 138.21,-74.79 137.99,-74.8
  Top Layer region: 119.88,-55.12 119.67,-55.11 119.46,-55.07 119.25,-55 119.06,-54.92 118.88,-54.8 118.71,-54.67 118.56,-54.52 118.42,-54.35 118.31,-54.17 118.23,-53.97 118.16,-53.77 118.12,-53.56 118.11,-53.35 118.11,-45.08 118.12,-44.87 118.16,-44.65 118.23,-44.45 118.31,-44.26 118.42,-44.07 118.56,-43.9 118.71,-43.75 118.88,-43.62 119.06,-43.51 119.25,-43.42 119.46,-43.36 119.67,-43.32 119.88,-43.31 137.99,-43.31 138.21,-43.32 138.42,-43.36 138.62,-43.42 138.82,-43.51 139,-43.62 139.17,-43.75 139.32,-43.9 139.45,-44.07 139.56,-44.26 139.65,-44.45 139.71,-44.65 139.75,-44.87 139.76,-45.08 139.76,-53.35 139.75,-53.56 139.71,-53.77 139.65,-53.97 139.56,-54.17 139.45,-54.35 139.32,-54.52 139.17,-54.67 139,-54.8 138.82,-54.92 138.62,-55 138.42,-55.07 138.21,-55.11 137.99,-55.12
  Top Layer region: 119.88,-35.43 119.67,-35.42 119.46,-35.38 119.25,-35.32 119.06,-35.23 118.88,-35.12 118.71,-34.99 118.56,-34.84 118.42,-34.67 118.31,-34.48 118.23,-34.29 118.16,-34.09 118.12,-33.87 118.11,-33.66 118.11,-25.39 118.12,-25.18 118.16,-24.97 118.23,-24.77 118.31,-24.57 118.42,-24.39 118.56,-24.22 118.71,-24.07 118.88,-23.94 119.06,-23.82 119.25,-23.74 119.46,-23.67 119.67,-23.63 119.88,-23.62 137.99,-23.62 138.21,-23.63 138.42,-23.67 138.62,-23.74 138.82,-23.82 139,-23.94 139.17,-24.07 139.32,-24.22 139.45,-24.39 139.56,-24.57 139.65,-24.77 139.71,-24.97 139.75,-25.18 139.76,-25.39 139.76,-33.66 139.75,-33.87 139.71,-34.09 139.65,-34.29 139.56,-34.48 139.45,-34.67 139.32,-34.84 139.17,-34.99 139,-35.12 138.82,-35.23 138.62,-35.32 138.42,-35.38 138.21,-35.42 137.99,-35.43
  Top Layer region: 119.88,-15.75 119.67,-15.74 119.46,-15.7 119.25,-15.63 119.06,-15.55 118.88,-15.43 118.71,-15.3 118.56,-15.15 118.42,-14.98 118.31,-14.8 118.23,-14.6 118.16,-14.4 118.12,-14.19 118.11,-13.98 118.11,-5.71 118.12,-5.5 118.16,-5.28 118.23,-5.08 118.31,-4.89 118.42,-4.7 118.56,-4.53 118.71,-4.38 118.88,-4.25 119.06,-4.14 119.25,-4.05 119.46,-3.99 119.67,-3.95 119.88,-3.94 137.99,-3.94 138.21,-3.95 138.42,-3.99 138.62,-4.05 138.82,-4.14 139,-4.25 139.17,-4.38 139.32,-4.53 139.45,-4.7 139.56,-4.89 139.65,-5.08 139.71,-5.28 139.75,-5.5 139.76,-5.71 139.76,-13.98 139.75,-14.19 139.71,-14.4 139.65,-14.6 139.56,-14.8 139.45,-14.98 139.32,-15.15 139.17,-15.3 139,-15.43 138.82,-15.55 138.62,-15.63 138.42,-15.7 138.21,-15.74 137.99,-15.75
  Top Layer region: 119.88,3.94 119.67,3.95 119.46,3.99 119.25,4.05 119.06,4.14 118.88,4.25 118.71,4.38 118.56,4.53 118.42,4.7 118.31,4.89 118.23,5.08 118.16,5.28 118.12,5.5 118.11,5.71 118.11,13.98 118.12,14.19 118.16,14.4 118.23,14.6 118.31,14.8 118.42,14.98 118.56,15.15 118.71,15.3 118.88,15.43 119.06,15.55 119.25,15.63 119.46,15.7 119.67,15.74 119.88,15.75 137.99,15.75 138.21,15.74 138.42,15.7 138.62,15.63 138.82,15.55 139,15.43 139.17,15.3 139.32,15.15 139.45,14.98 139.56,14.8 139.65,14.6 139.71,14.4 139.75,14.19 139.76,13.98 139.76,5.71 139.75,5.5 139.71,5.28 139.65,5.08 139.56,4.89 139.45,4.7 139.32,4.53 139.17,4.38 139,4.25 138.82,4.14 138.62,4.05 138.42,3.99 138.21,3.95 137.99,3.94
  Top Layer region: 119.88,23.62 119.67,23.63 119.46,23.67 119.25,23.74 119.06,23.82 118.88,23.94 118.71,24.07 118.56,24.22 118.42,24.39 118.31,24.57 118.23,24.77 118.16,24.97 118.12,25.18 118.11,25.39 118.11,33.66 118.12,33.87 118.16,34.09 118.23,34.29 118.31,34.48 118.42,34.67 118.56,34.84 118.71,34.99 118.88,35.12 119.06,35.23 119.25,35.32 119.46,35.38 119.67,35.42 119.88,35.43 137.99,35.43 138.21,35.42 138.42,35.38 138.62,35.32 138.82,35.23 139,35.12 139.17,34.99 139.32,34.84 139.45,34.67 139.56,34.48 139.65,34.29 139.71,34.09 139.75,33.87 139.76,33.66 139.76,25.39 139.75,25.18 139.71,24.97 139.65,24.77 139.56,24.57 139.45,24.39 139.32,24.22 139.17,24.07 139,23.94 138.82,23.82 138.62,23.74 138.42,23.67 138.21,23.63 137.99,23.62
  Top Layer region: 119.88,43.31 119.67,43.32 119.46,43.36 119.25,43.42 119.06,43.51 118.88,43.62 118.71,43.75 118.56,43.9 118.42,44.07 118.31,44.26 118.23,44.45 118.16,44.65 118.12,44.87 118.11,45.08 118.11,53.35 118.12,53.56 118.16,53.77 118.23,53.97 118.31,54.17 118.42,54.35 118.56,54.52 118.71,54.67 118.88,54.8 119.06,54.92 119.25,55 119.46,55.07 119.67,55.11 119.88,55.12 137.99,55.12 138.21,55.11 138.42,55.07 138.62,55 138.82,54.92 139,54.8 139.17,54.67 139.32,54.52 139.45,54.35 139.56,54.17 139.65,53.97 139.71,53.77 139.75,53.56 139.76,53.35 139.76,45.08 139.75,44.87 139.71,44.65 139.65,44.45 139.56,44.26 139.45,44.07 139.32,43.9 139.17,43.75 139,43.62 138.82,43.51 138.62,43.42 138.42,43.36 138.21,43.32 137.99,43.31
  Top Layer region: 119.88,62.99 119.67,63 119.46,63.04 119.25,63.11 119.06,63.19 118.88,63.31 118.71,63.44 118.56,63.59 118.42,63.76 118.31,63.94 118.23,64.14 118.16,64.34 118.12,64.55 118.11,64.76 118.11,73.03 118.12,73.24 118.16,73.46 118.23,73.66 118.31,73.85 118.42,74.04 118.56,74.21 118.71,74.36 118.88,74.49 119.06,74.6 119.25,74.69 119.46,74.75 119.67,74.79 119.88,74.8 137.99,74.8 138.21,74.79 138.42,74.75 138.62,74.69 138.82,74.6 139,74.49 139.17,74.36 139.32,74.21 139.45,74.04 139.56,73.85 139.65,73.66 139.71,73.46 139.75,73.24 139.76,73.03 139.76,64.76 139.75,64.55 139.71,64.34 139.65,64.14 139.56,63.94 139.45,63.76 139.32,63.59 139.17,63.44 139,63.31 138.82,63.19 138.62,63.11 138.42,63.04 138.21,63 137.99,62.99
  Top Layer region: 119.88,82.68 119.67,82.69 119.46,82.73 119.25,82.79 119.06,82.88 118.88,82.99 118.71,83.12 118.56,83.27 118.42,83.44 118.31,83.63 118.23,83.82 118.16,84.02 118.12,84.24 118.11,84.45 118.11,92.72 118.12,92.93 118.16,93.14 118.23,93.34 118.31,93.54 118.42,93.72 118.56,93.89 118.71,94.04 118.88,94.17 119.06,94.29 119.25,94.37 119.46,94.44 119.67,94.48 119.88,94.49 137.99,94.49 138.21,94.48 138.42,94.44 138.62,94.37 138.82,94.29 139,94.17 139.17,94.04 139.32,93.89 139.45,93.72 139.56,93.54 139.65,93.34 139.71,93.14 139.75,92.93 139.76,92.72 139.76,84.45 139.75,84.24 139.71,84.02 139.65,83.82 139.56,83.63 139.45,83.44 139.32,83.27 139.17,83.12 139,82.99 138.82,82.88 138.62,82.79 138.42,82.73 138.21,82.69 137.99,82.68
  Top Layer region: 119.88,102.36 119.67,102.37 119.46,102.41 119.25,102.48 119.06,102.56 118.88,102.68 118.71,102.81 118.56,102.96 118.42,103.13 118.31,103.31 118.23,103.51 118.16,103.71 118.12,103.92 118.11,104.13 118.11,112.4 118.12,112.61 118.16,112.83 118.23,113.03 118.31,113.22 118.42,113.41 118.56,113.58 118.71,113.73 118.88,113.86 119.06,113.97 119.25,114.06 119.46,114.12 119.67,114.16 119.88,114.17 137.99,114.17 138.21,114.16 138.42,114.12 138.62,114.06 138.82,113.97 139,113.86 139.17,113.73 139.32,113.58 139.45,113.41 139.56,113.22 139.65,113.03 139.71,112.83 139.75,112.61 139.76,112.4 139.76,104.13 139.75,103.92 139.71,103.71 139.65,103.51 139.56,103.31 139.45,103.13 139.32,102.96 139.17,102.81 139,102.68 138.82,102.56 138.62,102.48 138.42,102.41 138.21,102.37 137.99,102.36
  Top Layer region: 114.17,119.88 114.16,119.67 114.12,119.46 114.06,119.25 113.97,119.06 113.86,118.88 113.73,118.71 113.58,118.56 113.41,118.42 113.22,118.31 113.03,118.23 112.83,118.16 112.61,118.12 112.4,118.11 104.13,118.11 103.92,118.12 103.71,118.16 103.51,118.23 103.31,118.31 103.13,118.42 102.96,118.56 102.81,118.71 102.68,118.88 102.56,119.06 102.48,119.25 102.41,119.46 102.37,119.67 102.36,119.88 102.36,137.99 102.37,138.21 102.41,138.42 102.48,138.62 102.56,138.82 102.68,139 102.81,139.17 102.96,139.32 103.13,139.45 103.31,139.56 103.51,139.65 103.71,139.71 103.92,139.75 104.13,139.76 112.4,139.76 112.61,139.75 112.83,139.71 113.03,139.65 113.22,139.56 113.41,139.45 113.58,139.32 113.73,139.17 113.86,139 113.97,138.82 114.06,138.62 114.12,138.42 114.16,138.21 114.17,137.99
  Top Layer region: 94.49,119.88 94.48,119.67 94.44,119.46 94.37,119.25 94.29,119.06 94.17,118.88 94.04,118.71 93.89,118.56 93.72,118.42 93.54,118.31 93.34,118.23 93.14,118.16 92.93,118.12 92.72,118.11 84.45,118.11 84.24,118.12 84.02,118.16 83.82,118.23 83.63,118.31 83.44,118.42 83.27,118.56 83.12,118.71 82.99,118.88 82.88,119.06 82.79,119.25 82.73,119.46 82.69,119.67 82.68,119.88 82.68,137.99 82.69,138.21 82.73,138.42 82.79,138.62 82.88,138.82 82.99,139 83.12,139.17 83.27,139.32 83.44,139.45 83.63,139.56 83.82,139.65 84.02,139.71 84.24,139.75 84.45,139.76 92.72,139.76 92.93,139.75 93.14,139.71 93.34,139.65 93.54,139.56 93.72,139.45 93.89,139.32 94.04,139.17 94.17,139 94.29,138.82 94.37,138.62 94.44,138.42 94.48,138.21 94.49,137.99
  Top Layer region: 74.8,119.88 74.79,119.67 74.75,119.46 74.69,119.25 74.6,119.06 74.49,118.88 74.36,118.71 74.21,118.56 74.04,118.42 73.85,118.31 73.66,118.23 73.46,118.16 73.24,118.12 73.03,118.11 64.76,118.11 64.55,118.12 64.34,118.16 64.14,118.23 63.94,118.31 63.76,118.42 63.59,118.56 63.44,118.71 63.31,118.88 63.19,119.06 63.11,119.25 63.04,119.46 63,119.67 62.99,119.88 62.99,137.99 63,138.21 63.04,138.42 63.11,138.62 63.19,138.82 63.31,139 63.44,139.17 63.59,139.32 63.76,139.45 63.94,139.56 64.14,139.65 64.34,139.71 64.55,139.75 64.76,139.76 73.03,139.76 73.24,139.75 73.46,139.71 73.66,139.65 73.85,139.56 74.04,139.45 74.21,139.32 74.36,139.17 74.49,139 74.6,138.82 74.69,138.62 74.75,138.42 74.79,138.21 74.8,137.99
  Top Layer region: 55.12,119.88 55.11,119.67 55.07,119.46 55,119.25 54.92,119.06 54.8,118.88 54.67,118.71 54.52,118.56 54.35,118.42 54.17,118.31 53.97,118.23 53.77,118.16 53.56,118.12 53.35,118.11 45.08,118.11 44.87,118.12 44.65,118.16 44.45,118.23 44.26,118.31 44.07,118.42 43.9,118.56 43.75,118.71 43.62,118.88 43.51,119.06 43.42,119.25 43.36,119.46 43.32,119.67 43.31,119.88 43.31,137.99 43.32,138.21 43.36,138.42 43.42,138.62 43.51,138.82 43.62,139 43.75,139.17 43.9,139.32 44.07,139.45 44.26,139.56 44.45,139.65 44.65,139.71 44.87,139.75 45.08,139.76 53.35,139.76 53.56,139.75 53.77,139.71 53.97,139.65 54.17,139.56 54.35,139.45 54.52,139.32 54.67,139.17 54.8,139 54.92,138.82 55,138.62 55.07,138.42 55.11,138.21 55.12,137.99
  Top Layer region: 35.43,119.88 35.42,119.67 35.38,119.46 35.32,119.25 35.23,119.06 35.12,118.88 34.99,118.71 34.84,118.56 34.67,118.42 34.48,118.31 34.29,118.23 34.09,118.16 33.87,118.12 33.66,118.11 25.39,118.11 25.18,118.12 24.97,118.16 24.77,118.23 24.57,118.31 24.39,118.42 24.22,118.56 24.07,118.71 23.94,118.88 23.82,119.06 23.74,119.25 23.67,119.46 23.63,119.67 23.62,119.88 23.62,137.99 23.63,138.21 23.67,138.42 23.74,138.62 23.82,138.82 23.94,139 24.07,139.17 24.22,139.32 24.39,139.45 24.57,139.56 24.77,139.65 24.97,139.71 25.18,139.75 25.39,139.76 33.66,139.76 33.87,139.75 34.09,139.71 34.29,139.65 34.48,139.56 34.67,139.45 34.84,139.32 34.99,139.17 35.12,139 35.23,138.82 35.32,138.62 35.38,138.42 35.42,138.21 35.43,137.99
  Top Layer region: 15.75,119.88 15.74,119.67 15.7,119.46 15.63,119.25 15.55,119.06 15.43,118.88 15.3,118.71 15.15,118.56 14.98,118.42 14.8,118.31 14.6,118.23 14.4,118.16 14.19,118.12 13.98,118.11 5.71,118.11 5.5,118.12 5.28,118.16 5.08,118.23 4.89,118.31 4.7,118.42 4.53,118.56 4.38,118.71 4.25,118.88 4.14,119.06 4.05,119.25 3.99,119.46 3.95,119.67 3.94,119.88 3.94,137.99 3.95,138.21 3.99,138.42 4.05,138.62 4.14,138.82 4.25,139 4.38,139.17 4.53,139.32 4.7,139.45 4.89,139.56 5.08,139.65 5.28,139.71 5.5,139.75 5.71,139.76 13.98,139.76 14.19,139.75 14.4,139.71 14.6,139.65 14.8,139.56 14.98,139.45 15.15,139.32 15.3,139.17 15.43,139 15.55,138.82 15.63,138.62 15.7,138.42 15.74,138.21 15.75,137.99
  Top Layer region: -3.94,119.88 -3.95,119.67 -3.99,119.46 -4.05,119.25 -4.14,119.06 -4.25,118.88 -4.38,118.71 -4.53,118.56 -4.7,118.42 -4.89,118.31 -5.08,118.23 -5.28,118.16 -5.5,118.12 -5.71,118.11 -13.98,118.11 -14.19,118.12 -14.4,118.16 -14.6,118.23 -14.8,118.31 -14.98,118.42 -15.15,118.56 -15.3,118.71 -15.43,118.88 -15.55,119.06 -15.63,119.25 -15.7,119.46 -15.74,119.67 -15.75,119.88 -15.75,137.99 -15.74,138.21 -15.7,138.42 -15.63,138.62 -15.55,138.82 -15.43,139 -15.3,139.17 -15.15,139.32 -14.98,139.45 -14.8,139.56 -14.6,139.65 -14.4,139.71 -14.19,139.75 -13.98,139.76 -5.71,139.76 -5.5,139.75 -5.28,139.71 -5.08,139.65 -4.89,139.56 -4.7,139.45 -4.53,139.32 -4.38,139.17 -4.25,139 -4.14,138.82 -4.05,138.62 -3.99,138.42 -3.95,138.21 -3.94,137.99
  Top Layer region: -23.62,119.88 -23.63,119.67 -23.67,119.46 -23.74,119.25 -23.82,119.06 -23.94,118.88 -24.07,118.71 -24.22,118.56 -24.39,118.42 -24.57,118.31 -24.77,118.23 -24.97,118.16 -25.18,118.12 -25.39,118.11 -33.66,118.11 -33.87,118.12 -34.09,118.16 -34.29,118.23 -34.48,118.31 -34.67,118.42 -34.84,118.56 -34.99,118.71 -35.12,118.88 -35.23,119.06 -35.32,119.25 -35.38,119.46 -35.42,119.67 -35.43,119.88 -35.43,137.99 -35.42,138.21 -35.38,138.42 -35.32,138.62 -35.23,138.82 -35.12,139 -34.99,139.17 -34.84,139.32 -34.67,139.45 -34.48,139.56 -34.29,139.65 -34.09,139.71 -33.87,139.75 -33.66,139.76 -25.39,139.76 -25.18,139.75 -24.97,139.71 -24.77,139.65 -24.57,139.56 -24.39,139.45 -24.22,139.32 -24.07,139.17 -23.94,139 -23.82,138.82 -23.74,138.62 -23.67,138.42 -23.63,138.21 -23.62,137.99
  Top Layer region: -43.31,119.88 -43.32,119.67 -43.36,119.46 -43.42,119.25 -43.51,119.06 -43.62,118.88 -43.75,118.71 -43.9,118.56 -44.07,118.42 -44.26,118.31 -44.45,118.23 -44.65,118.16 -44.87,118.12 -45.08,118.11 -53.35,118.11 -53.56,118.12 -53.77,118.16 -53.97,118.23 -54.17,118.31 -54.35,118.42 -54.52,118.56 -54.67,118.71 -54.8,118.88 -54.92,119.06 -55,119.25 -55.07,119.46 -55.11,119.67 -55.12,119.88 -55.12,137.99 -55.11,138.21 -55.07,138.42 -55,138.62 -54.92,138.82 -54.8,139 -54.67,139.17 -54.52,139.32 -54.35,139.45 -54.17,139.56 -53.97,139.65 -53.77,139.71 -53.56,139.75 -53.35,139.76 -45.08,139.76 -44.87,139.75 -44.65,139.71 -44.45,139.65 -44.26,139.56 -44.07,139.45 -43.9,139.32 -43.75,139.17 -43.62,139 -43.51,138.82 -43.42,138.62 -43.36,138.42 -43.32,138.21 -43.31,137.99
  Top Layer region: -62.99,119.88 -63,119.67 -63.04,119.46 -63.11,119.25 -63.19,119.06 -63.31,118.88 -63.44,118.71 -63.59,118.56 -63.76,118.42 -63.94,118.31 -64.14,118.23 -64.34,118.16 -64.55,118.12 -64.76,118.11 -73.03,118.11 -73.24,118.12 -73.46,118.16 -73.66,118.23 -73.85,118.31 -74.04,118.42 -74.21,118.56 -74.36,118.71 -74.49,118.88 -74.6,119.06 -74.69,119.25 -74.75,119.46 -74.79,119.67 -74.8,119.88 -74.8,137.99 -74.79,138.21 -74.75,138.42 -74.69,138.62 -74.6,138.82 -74.49,139 -74.36,139.17 -74.21,139.32 -74.04,139.45 -73.85,139.56 -73.66,139.65 -73.46,139.71 -73.24,139.75 -73.03,139.76 -64.76,139.76 -64.55,139.75 -64.34,139.71 -64.14,139.65 -63.94,139.56 -63.76,139.45 -63.59,139.32 -63.44,139.17 -63.31,139 -63.19,138.82 -63.11,138.62 -63.04,138.42 -63,138.21 -62.99,137.99
  Top Layer region: -82.68,119.88 -82.69,119.67 -82.73,119.46 -82.79,119.25 -82.88,119.06 -82.99,118.88 -83.12,118.71 -83.27,118.56 -83.44,118.42 -83.63,118.31 -83.82,118.23 -84.02,118.16 -84.24,118.12 -84.45,118.11 -92.72,118.11 -92.93,118.12 -93.14,118.16 -93.34,118.23 -93.54,118.31 -93.72,118.42 -93.89,118.56 -94.04,118.71 -94.17,118.88 -94.29,119.06 -94.37,119.25 -94.44,119.46 -94.48,119.67 -94.49,119.88 -94.49,137.99 -94.48,138.21 -94.44,138.42 -94.37,138.62 -94.29,138.82 -94.17,139 -94.04,139.17 -93.89,139.32 -93.72,139.45 -93.54,139.56 -93.34,139.65 -93.14,139.71 -92.93,139.75 -92.72,139.76 -84.45,139.76 -84.24,139.75 -84.02,139.71 -83.82,139.65 -83.63,139.56 -83.44,139.45 -83.27,139.32 -83.12,139.17 -82.99,139 -82.88,138.82 -82.79,138.62 -82.73,138.42 -82.69,138.21 -82.68,137.99
  Top Layer region: -102.36,119.88 -102.37,119.67 -102.41,119.46 -102.48,119.25 -102.56,119.06 -102.68,118.88 -102.81,118.71 -102.96,118.56 -103.13,118.42 -103.31,118.31 -103.51,118.23 -103.71,118.16 -103.92,118.12 -104.13,118.11 -112.4,118.11 -112.61,118.12 -112.83,118.16 -113.03,118.23 -113.22,118.31 -113.41,118.42 -113.58,118.56 -113.73,118.71 -113.86,118.88 -113.97,119.06 -114.06,119.25 -114.12,119.46 -114.16,119.67 -114.17,119.88 -114.17,137.99 -114.16,138.21 -114.12,138.42 -114.06,138.62 -113.97,138.82 -113.86,139 -113.73,139.17 -113.58,139.32 -113.41,139.45 -113.22,139.56 -113.03,139.65 -112.83,139.71 -112.61,139.75 -112.4,139.76 -104.13,139.76 -103.92,139.75 -103.71,139.71 -103.51,139.65 -103.31,139.56 -103.13,139.45 -102.96,139.32 -102.81,139.17 -102.68,139 -102.56,138.82 -102.48,138.62 -102.41,138.42 -102.37,138.21 -102.36,137.99
QFN50P400X400X95-25T265X275N [mil]
  rect 10.2x31.1 smd: 1(-49,-78) 2(-30,-78) 3(-10,-78) 4(10,-78) 5(30,-78) 6(49,-78) 13(49,78) 14(30,78) 15(10,78) 16(-10,78) 17(-30,78) 18(-49,78)
  rect 31.1x10.2 smd: 7(78,-49) 8(78,-30) 9(78,-10) 10(78,10) 11(78,30) 12(78,49) 19(-78,49) 20(-78,30) 21(-78,10) 22(-78,-10) 23(-78,-30) 24(-78,-49)
  rect 84.6x80.65 smd: 25(0,-0.03)
  silkscreen extent -83,-83 83,83
QFN-24-1EP_4X4MM_PITCH0.5MM [mm]
  rect 0.85x0.3 smd: 1(-1.95,1.25) 2(-1.95,0.75) 3(-1.95,0.25) 4(-1.95,-0.25) 5(-1.95,-0.75) 6(-1.95,-1.25) 13(1.95,-1.25) 14(1.95,-0.75) 15(1.95,-0.25) 16(1.95,0.25) 17(1.95,0.75) 18(1.95,1.25)
  rect 0.3x0.85 smd: 7(-1.25,-1.95) 8(-0.75,-1.95) 9(-0.25,-1.95) 10(0.25,-1.95) 11(0.75,-1.95) 12(1.25,-1.95) 19(1.25,1.95) 20(0.75,1.95) 21(0.25,1.95) 22(-0.25,1.95) 23(-0.75,1.95) 24(-1.25,1.95)
  rect 1.3x1.3 smd: 25(-0.65,0.65) 25(-0.65,-0.65) 25(0.65,0.65) 25(0.65,-0.65)
  silkscreen extent -2.15,-2.15 2.15,2.15
R0603 [mm]
  rect 1x1.1 smd: 1(-0.8,0) 2(0.8,0)
  silkscreen extent -1.55,-0.8 1.55,0.81
S2B-PH-K-S(LF)(SN) [mil]
  rect 55.1x55.1 hole 39.4: 1(0,-39.4)
  round 55.1 hole 39.4: 2(0,39.4)
  silkscreen extent -246,-118 63,118
SC70 [mil]
  rect 15.7x29.5 smd: 1(-26,-32) 2(0,-32) 3(26,-32) 4(26,32) 5(-26,32)
SOD-123HE_L2.8-W1.8-LS3.7-RD [mm]
  rect 2.6x1.4 smd: 1(-1.25,0)
  rect 1.3x1.4 smd: 2(1.25,0)
  silkscreen extent -1.57,-1.02 1.48,1.02
SOT23-3 [mil]
  rect 31.5x35.4 smd: 1(-37,-41) 2(37,-41) 3(0,41)
  silkscreen extent -55,-6 55,26
SOT-23_L2.9-W1.3-P0.95-LS2.4-BR [mm]
  rect 1.3x0.6 smd: 1(1.2,-0.95) 2(1.2,0.95) 3(-1.2,0)
  silkscreen extent -0.7,-1.5 0.7,1.5
SOT-23F [mil]
  rect 23.62x23.63 smd: 1(-37.4,-47.24) 2(37.4,-47.24)
  rect 23.62x23.62 smd: 3(0,47.24)
  silkscreen extent -59,-35 59,35
SOT-223 [mm]
  rect 2x1.2 smd: 1(-3.175,2.3) 2(-3.175,0) 3(-3.175,-2.3)
  rect 2.3x3.8 smd: 4(3.175,0)
  silkscreen extent -1.93,-3.2 1.87,3.2
TDFN-10_L3.0-W3.0-P0.50-BL-EP [mm]
  oval 0.25x0.7 smd: 1(-1.001,-1.524) 2(-0.5,-1.524) 3(0,-1.524) 4(0.5,-1.524) 5(1.001,-1.524) 6(1.001,1.524) 7(0.5,1.524) 8(0,1.524) 9(-0.5,1.524) 10(-1.001,1.524)
  rect 2.3x1.5 smd: 11(0,0)
  silkscreen extent -1.55,-1.88 1.5,1.5
? [mil]

## Via types
v1: diameter 24, hole 12, Top Layer to Bottom Layer, 85 vias